# Altium PCB jetsonStuff (4).PCBDOC
Units mil, origin at the board's own origin, x right, y up, seen from the top; angles counter-clockwise.
Board outline 2609.56 x 1008.54 mil, 4 copper layers (Top Layer, Top, Mid-Layer 1, Mid-Layer 2, Bottom Layer, Bottom); 25 components, 15 nets, 79 pads, 27 vias.
Unrouted connection lines stored in the file: 1.
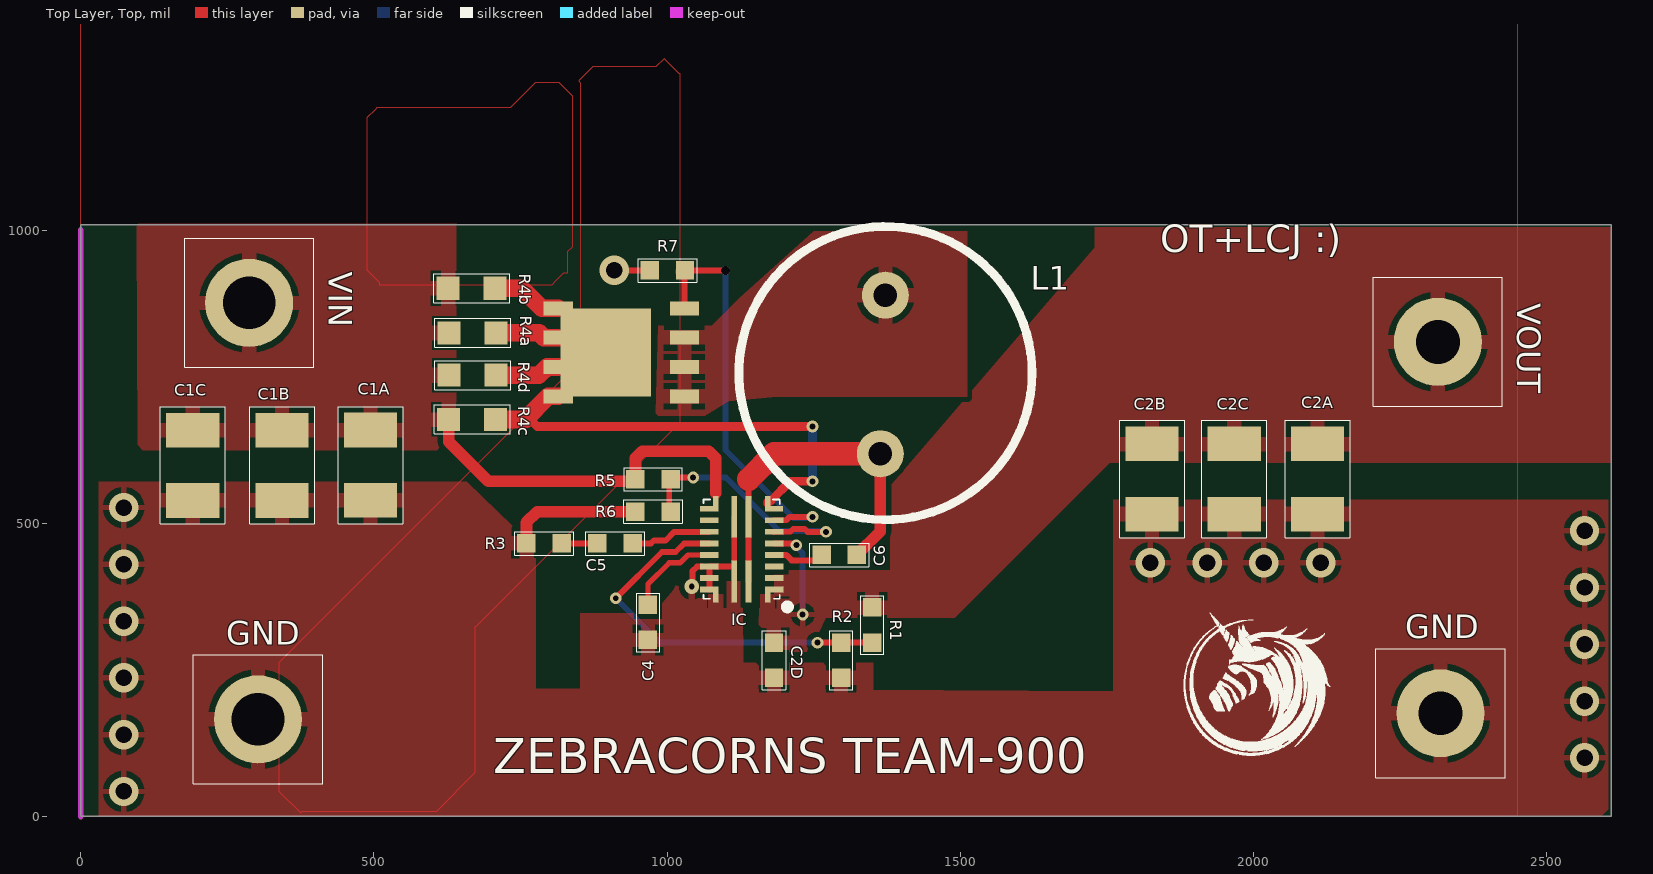
[diagram p0: Top Layer, Top view]
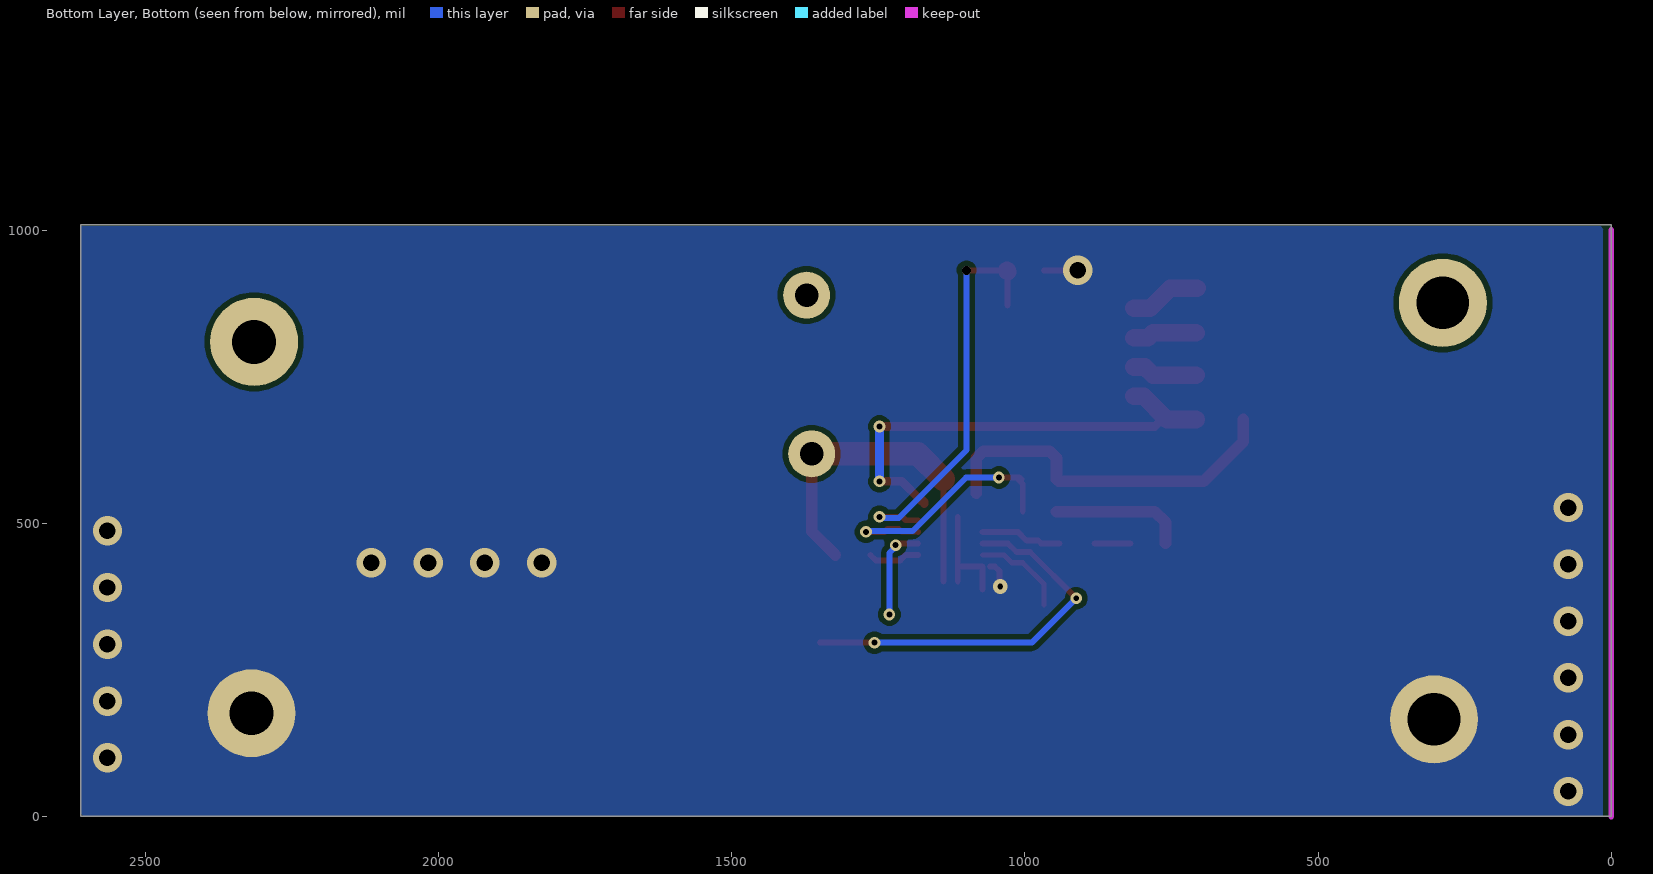
[diagram p1: Bottom Layer, Bottom view, seen from below]

## Layer stack, top to bottom
Top Solder, Top Mask: solder mask 0.4, Solder Resist, Dk 3.5
Top Layer, Top: signal copper 1.4
Dielectric1: core 12.6, FR-4, Dk 4.8
Mid-Layer 1: signal copper 1.4
Dielectric2: prepreg 12.6, FR-4, Dk 4.8
Mid-Layer 2: signal copper 1.4
Dielectric3: core 12.6, FR-4, Dk 4.8
Bottom Layer, Bottom: signal copper 1.4
Bottom Solder, Bot Mask: solder mask 0.4, Solder Resist, Dk 3.5

## Board outline
0,1 0,1009.54 2609.56,1009.54 2609.56,1

## Design rules (kind name [scope] priority, off if disabled: settings)
Clearance Clearance_1 [InNamedPolygon('NETC1A_1_L04_P066')] p1: gap=10 ignorepadtopadclearanceinfootprint=FALSE except(0: Arc-Hole Track-Hole SMDPad-Hole THPad-Hole Via-Hole Fill-Hole Poly-Hole Region-Hole Text-Hole)
Clearance Clearance_GND1_PLANE [(InNet('GND1') AND IsRegion) vs (OnLayer('Bottom Layer, Bottom') OR OnLayer('Multi-Layer'))] p2: gap=25 ignorepadtopadclearanceinfootprint=FALSE except(0: Arc-Hole Track-Hole SMDPad-Hole THPad-Hole Via-Hole Fill-Hole Poly-Hole Region-Hole Text-Hole)
Clearance Clearance_U1 [InComponent('U1') vs InComponent('U1')] p3: gap=9 ignorepadtopadclearanceinfootprint=FALSE except(0: Arc-Hole Track-Hole SMDPad-Hole THPad-Hole Via-Hole Fill-Hole Poly-Hole Region-Hole Text-Hole)
Clearance [All] p4: gap=9 ignorepadtopadclearanceinfootprint=FALSE except(0: Arc-Hole Track-Hole SMDPad-Hole THPad-Hole Via-Hole Fill-Hole Poly-Hole Region-Hole Text-Hole)
FabricationTestpoint [(IsPad And (OnTopLayer Or OnBottomLayer))] p1: side=3 testpointundercomponent=TRUE minsize=40 maxsize=100 preferedsize=60 minholesize=0 maxholesize=40 preferedholesize=32 testpointgrid=1 allowsidetop=TRUE allowsidebottom=TRUE usegrid=TRUE gridtolerance=0.01
HoleSize [All] p1: absolutevalues=TRUE maxlimit=120 minlimit=9 maxpercent=80.000 minpercent=20.000
MinimumSolderMaskSliver [All] p1: minsoldermaskwidth=0
PlaneClearance [All] p1: clearance=9
PlaneConnect [All] p1: planeconnectstyle=Direct reliefexpansion=20 reliefentries=4 reliefconductorwidth=10 reliefairgap=10
PolygonConnect PolygonConnect_11 [All vs IsNamedPolygon('NETC1A_1_L04_P068')] p1: thpad.connectstyle=Relief thpad.reliefconductorwidth=25 thpad.reliefentries=4 thpad.polygonreliefangle="90 Angle" thpad.airgapwidth=10 smdpad.connectstyle=Relief smdpad.reliefconductorwidth=25 smdpad.reliefentries=4 smdpad.polygonreliefangle="90 Angle" smdpad.airgapwidth=10 via.connectstyle=Relief via.reliefconductorwidth=10 via.reliefentries=4 via.polygonreliefangle="90 Angle" via.airgapwidth=10
PolygonConnect PolygonConnect_10 [All vs IsNamedPolygon('GND_L01_P064')] p2: thpad.connectstyle=Relief thpad.reliefconductorwidth=25 thpad.reliefentries=4 thpad.polygonreliefangle="90 Angle" thpad.airgapwidth=10 smdpad.connectstyle=Relief smdpad.reliefconductorwidth=25 smdpad.reliefentries=4 smdpad.polygonreliefangle="90 Angle" smdpad.airgapwidth=10 via.connectstyle=Relief via.reliefconductorwidth=10 via.reliefentries=4 via.polygonreliefangle="90 Angle" via.airgapwidth=10
PolygonConnect PolygonConnect_9 [All vs IsNamedPolygon('NETC2A_1_L01_P063')] p3: thpad.connectstyle=Relief thpad.reliefconductorwidth=25 thpad.reliefentries=4 thpad.polygonreliefangle="90 Angle" thpad.airgapwidth=10 smdpad.connectstyle=Relief smdpad.reliefconductorwidth=25 smdpad.reliefentries=4 smdpad.polygonreliefangle="90 Angle" smdpad.airgapwidth=10 via.connectstyle=Relief via.reliefconductorwidth=10 via.reliefentries=4 via.polygonreliefangle="90 Angle" via.airgapwidth=10
PolygonConnect PolygonConnect_8 [All vs IsNamedPolygon('NETL1_1_L01_P062')] p4: thpad.connectstyle=Relief thpad.reliefconductorwidth=25 thpad.reliefentries=4 thpad.polygonreliefangle="90 Angle" thpad.airgapwidth=10 smdpad.connectstyle=Relief smdpad.reliefconductorwidth=25 smdpad.reliefentries=4 smdpad.polygonreliefangle="90 Angle" smdpad.airgapwidth=10 via.connectstyle=Relief via.reliefconductorwidth=10 via.reliefentries=4 via.polygonreliefangle="90 Angle" via.airgapwidth=10
PolygonConnect PolygonConnect_7 [All vs IsNamedPolygon('gnd')] p5: thpad.connectstyle=Relief thpad.reliefconductorwidth=25 thpad.reliefentries=4 thpad.polygonreliefangle="90 Angle" thpad.airgapwidth=10 smdpad.connectstyle=Relief smdpad.reliefconductorwidth=25 smdpad.reliefentries=4 smdpad.polygonreliefangle="90 Angle" smdpad.airgapwidth=10 via.connectstyle=Relief via.reliefconductorwidth=10 via.reliefentries=4 via.polygonreliefangle="90 Angle" via.airgapwidth=10
PolygonConnect PolygonConnect_6 [All vs IsNamedPolygon('NETC2A_1_L01_P059')] p6: thpad.connectstyle=Relief thpad.reliefconductorwidth=25 thpad.reliefentries=4 thpad.polygonreliefangle="90 Angle" thpad.airgapwidth=10 smdpad.connectstyle=Relief smdpad.reliefconductorwidth=25 smdpad.reliefentries=4 smdpad.polygonreliefangle="90 Angle" smdpad.airgapwidth=10 via.connectstyle=Relief via.reliefconductorwidth=10 via.reliefentries=4 via.polygonreliefangle="90 Angle" via.airgapwidth=10
PolygonConnect PolygonConnect_5 [All vs IsNamedPolygon('NETC1A_1_L01_P057')] p7: thpad.connectstyle=Relief thpad.reliefconductorwidth=25 thpad.reliefentries=4 thpad.polygonreliefangle="90 Angle" thpad.airgapwidth=10 smdpad.connectstyle=Relief smdpad.reliefconductorwidth=25 smdpad.reliefentries=4 smdpad.polygonreliefangle="90 Angle" smdpad.airgapwidth=10 via.connectstyle=Relief via.reliefconductorwidth=10 via.reliefentries=4 via.polygonreliefangle="90 Angle" via.airgapwidth=10
PolygonConnect PolygonConnect_4 [All vs IsNamedPolygon('NETC1A_1_L01_P057')] p8: thpad.connectstyle=Relief thpad.reliefconductorwidth=25 thpad.reliefentries=4 thpad.polygonreliefangle="90 Angle" thpad.airgapwidth=10 smdpad.connectstyle=Relief smdpad.reliefconductorwidth=25 smdpad.reliefentries=4 smdpad.polygonreliefangle="90 Angle" smdpad.airgapwidth=10 via.connectstyle=Relief via.reliefconductorwidth=10 via.reliefentries=4 via.polygonreliefangle="90 Angle" via.airgapwidth=10
PolygonConnect PolygonConnect_3 [All vs IsNamedPolygon('NETC1A_1_L01_P057')] p9: thpad.connectstyle=Relief thpad.reliefconductorwidth=25 thpad.reliefentries=4 thpad.polygonreliefangle="90 Angle" thpad.airgapwidth=10 smdpad.connectstyle=Relief smdpad.reliefconductorwidth=25 smdpad.reliefentries=4 smdpad.polygonreliefangle="90 Angle" smdpad.airgapwidth=10 via.connectstyle=Relief via.reliefconductorwidth=10 via.reliefentries=4 via.polygonreliefangle="90 Angle" via.airgapwidth=10
PolygonConnect PolygonConnect_2 [All vs IsNamedPolygon('NETC1A_1_L01_P057')] p10: thpad.connectstyle=Relief thpad.reliefconductorwidth=25 thpad.reliefentries=4 thpad.polygonreliefangle="90 Angle" thpad.airgapwidth=10 smdpad.connectstyle=Relief smdpad.reliefconductorwidth=25 smdpad.reliefentries=4 smdpad.polygonreliefangle="90 Angle" smdpad.airgapwidth=10 via.connectstyle=Relief via.reliefconductorwidth=10 via.reliefentries=4 via.polygonreliefangle="90 Angle" via.airgapwidth=10
PolygonConnect PolygonConnect_1 [All vs IsNamedPolygon('Top Layer, Top-No Net')] p11: thpad.connectstyle=Relief thpad.reliefconductorwidth=10 thpad.reliefentries=4 thpad.polygonreliefangle="90 Angle" thpad.airgapwidth=10 smdpad.connectstyle=Relief smdpad.reliefconductorwidth=20 smdpad.reliefentries=4 smdpad.polygonreliefangle="90 Angle" smdpad.airgapwidth=10 via.connectstyle=Relief via.reliefconductorwidth=10 via.reliefentries=4 via.polygonreliefangle="90 Angle" via.airgapwidth=10
PolygonConnect [All] p12: connectstyle=Direct reliefconductorwidth=10 reliefentries=4 polygonreliefangle="90 Angle" airgapwidth=10
RoutingVias [All] p1: holewidth=28 width=120 viastyle="Through Hole" minholewidth=9 minwidth=16 maxholewidth=100 maxwidth=50
SilkToSilkClearance [All] p1: silktosilkclearance=0
SilkToSolderMaskClearance SilkscreenOverComponentPads [IsPad] p1: minsilkscreentomaskgap=0 clearancetoexposedcopper=TRUE
SolderMaskExpansion [All] p1: expansion=4 istentingtop=FALSE
Width [All] p1: maxlimit=40 minlimit=7 preferedwidth=30
23 further rules are at their usual default settings.

## Classes and differential pairs
component class T-EV3435: C1A C1C C2B C2C C2D C5 C6 GND R2 R4a R4b R4c R4d R5 R6 R7 VOUT

## Components (designator, comment, footprint, x,y, rotation, side; value= is the part's Value field where it differs from the comment)
C1A "CAP/1210" CAP/1210 494,659.76 r270 top
C1B "CAP/1210" CAP/1210 343.39,659.67 r270 top
C1C "CAP/1210" CAP/1210 191.07,659.67 r270 top
C2A "CAP/1210" CAP/1210 2109.12,636.25 r270 top
C2B "CAP/1210" CAP/1210 1826.93,636.26 r270 top
C2C "CAP/1210" CAP/1210 1967,636.25 r270 top
C2D "CAP/0603" CAP/0603 1182.24,297.25 r270 top
C4 "CAP/0603" CAP/0603 967.23,301.85 r90 top (schematic designator C5)
C5 "CAP/0603" CAP/0603 881.17,466.51 r0 top
C6 "CAP/0603" CAP/0603 1263.5,446.82 r0 top
GND "GND" TP2MM#1 2318.93,176.85 r0 top (schematic designator VIN)
GND "GND" TP2MM#2 302.26,166.58 r0 top (schematic designator VIN)
IC "MP3435" QFN(3x4mm) 1182.28,387.76 r180 top (schematic designator U1)
R1 "RES/0603" RES/0603 1349.53,297.25 r90 top
R2 "RES/0603" RES/0603 1296.61,237.25 r90 top
R3 "RES/0603" RES/0603 760,466.51 r0 top (schematic designator R1)
R4a "RES/0805" CAP/0805 628.08,825.35 r0 top
R4b "RES/0805" CAP/0805 626.53,901.54 r0 top
R4c "RES/0805" CAP/0805 627.44,677.74 r0 top
R4d "RES/0805" CAP/0805 628.09,753.32 r0 top
R5 "RES/0603" RES/0603 1005.97,575.83 r180 top
R6 "RES/0603" RES/0603 945.97,520.64 r0 top
R7 "RES/0603" RES/0603 970.44,932 r0 top
VIN "VIN" TP2MM#2 287.4,876.69 r0 top
VOUT "VOUT" TP2MM#1 2314.12,810.18 r0 top (schematic designator VIN)

## Footprints (in the part's own frame and the unit in brackets; to place one, negate y for a bottom-side part, rotate by r counter-clockwise, add the part's x,y. Pads: shape width x height; smd on the part's side, far side on the other; paste and mask are expansions set on the pad)
CAP/0603 [mm]
  rect 0.8x0.8 smd: 1(0,0) 2(1.524,0)
  silkscreen extent -0.51,-0.51 2.03,0.51
CAP/0805 [mm]
  rect 1x1 smd: 1(0,0) 2(2.032,0)
  silkscreen extent -0.62,-0.62 2.67,0.64
CAP/1210 [mm]
  rect 1.5x2.3 smd paste-25.4: 1(0,0) 2(3.048,0)
  silkscreen extent -1.02,-1.4 4.06,1.4
QFN(3x4mm) [mm]
  rect 0.8x0.25 smd: 1(0,0) 2(0,-0.5) 3(0,-1) 4(0,-1.5) 5(0,-2) 6(0,-2.5) 7(0,-3) 8(0.001,-3.5) 11(2.8,-3.5) 12(2.8,-3) 13(2.8,-2.5) 14(2.8,-2) 15(2.8,-1.5) 16(2.8,-1) 17(2.8,-0.5) 18(2.8,0)
  rect 0.25x0.675 smd: 1(0.275,0.213) 8(0.276,-3.713) 11(2.525,-3.713) 18(2.525,0.213)
  rect 0.25x1.8 smd: 9(1.1,-3.15) 10(1.725,-3.15) 19(1.725,-0.35) 20(1.1,-0.35)
  silkscreen extent -0.66,-3.9 3.05,0.83
RES/0603 [mm]
  rect 0.8x0.8 smd: 1(0,0) 2(1.524,0)
  silkscreen extent -0.51,-0.51 2.03,0.51
TP2MM#1 [mil]
  round 150 hole 75: 1(0,0)
  silkscreen extent -110,-110 110,110
TP2MM#2 [mil]
  round 150 hole 90: 1(0,0)
  silkscreen extent -110,-110 110,110

## Part data
C2D: library part CAP/1210
GND GND VIN VOUT: library part TP/2MM, "2mm  plugin pin"
R1 R2 R3 R4a R4b R4c R4d R5 R6 R7: "Film Res., 1%"

## Free pads (board coordinates)
  rect 50x24 smd paste+0: 1(1029.49,717.33) 2(1029.49,767.33) 3(1029.49,817.33) 4(1029.49,867.33) 5(814.49,867.33) 6(814.49,817.33) 7(814.49,767.33) 8(814.49,717.33)
  rect 154x150 smd paste+0: 9(895.49,792.33)
  round 80 hole 40: 22(1372.21,889.74) 23(1363.5,619.1)

## Via types
v1: diameter 50, hole 28, Top Layer, Top to Bottom Layer, Bottom, 16 vias
v2: diameter 20, hole 10, Top Layer, Top to Bottom Layer, Bottom, 9 vias
v3: diameter 25, hole 10, Top Layer, Top to Bottom Layer, Bottom, 1 vias
v4: diameter 15, hole 15, Top Layer, Top to Bottom Layer, Bottom, 1 vias

## Nets (pads, with @x,y where several pads share a name; then routed paths per layer and width w, separated by ;. In a path a pad name is that pad's centre, name@x,y a point inside that pad or via, vN(x,y) a via of type N, cw(c..) or ccw(c..) an arc to the next point about the centre after c; other vN are vias at no path point)
GND: C1A.2 C1B.2 C1C.2 C2A.2 C2B.2 C2C.2 C2D.2 C4.1 GND.1 IC.10 IC.16 IC.17 IC.18 IC.19 R2.1 R3.1 R6.1 R7.1 | length 525.4
  Top Layer, Top w10: v1@910.42,931.61 R7.1@967.45,931.61 ; v3@1042.94,393.84 1042.94,418.89 1051.19,427.14 IC.16@1059.64,427.14 ; IC.18@1072.04,387.76 IC.17 IC.16 1114.28,427.14 IC.19@1114.36,427.06 ; IC.19 IC.19@1114.36,427.06 ; IC.10 IC.19@1114.36,427.06
  Top Layer, Top w20: R3.1 760,502.24 778.4,520.64 R6.1 ; v3(1041.99,392.89) v3@1042.94,393.84
  Top Layer, Top w30: v1(910.03,932) v1@910.42,931.61
  other v1: 73.17,43.5 2564.4,100.76 73.17,140.32 2564.4,197.58 73.17,237.14 2564.4,294.4 73.17,333.96 2564.4,391.22 73.17,430.78 1823.91,433.34 1920.73,433.34 2017.55,433.34 2114.37,433.34 2564.4,488.04 73.17,527.6
NetC1A_1: C1A.1 C1B.1 C1C.1 IC.11 R4a.1 R4b.1 R4c.1 R4d.1 R5.2 VIN.1 | length 628.4
  Top Layer, Top w20: R4c.1 627.72,677.45 627.72,639.77 695.21,572.29 942.42,572.29 R5.2 945.97,612.04 957.68,623.76 1071.15,623.76 1082.87,612.04 1082.87,552.17
NetC2A_1: C2A.1 C2B.1 C2C.1 C2D.1 IC.1 IC.2 IC.5 R1.2 VOUT.1 | length 162.3
  Top Layer, Top w10: IC.5 1214.6,466.51 1217.59,463.51 v2(1220.3,463.51)
  Bottom Layer, Bottom w10: v2(1220.3,463.51) 1220.3,460.96 1231.03,450.22 v2@1231.03,344.92
  other v2: 1231.03,345.17
NetC3_1: IC.12
NetC4_1: C4.2 IC.15 | length 160.6
  Top Layer, Top w9: C4.2 967.23,396.95 1003.62,433.34 1022.09,433.34 1035.57,446.82 IC.15
NetC5_1: C5.1 R3.2 | length 61.2
  Top Layer, Top w10: R3.2 C5.1
NetC5_2: C5.2 IC.13 | length 139
  Top Layer, Top w10: C5.2 972.49,466.51 977.41,471.43 997.41,471.43 1012.09,486.11 1071.96,486.11 IC.13
NetC6_1: C6.1 IC.4 | length 88.9
  Top Layer, Top w10: IC.4 1182.35,446.74 1203,446.74 1203.68,446.06 1203.82,446.06 1212.3,437.58 1254.26,437.58 C6.1
NetC6_2: C6.2 IC.9 IC.20 pad.23 | length 605.6
  Top Layer, Top w10: IC.20 1138.97,575.83
  Top Layer, Top w20: C6.2 1363.5,486.82 pad.23
  Top Layer, Top w40: 1138.97,575.83 1182.24,619.1 pad.23
NetEN_1: IC.6 R5.1 R6.2 | length 459.9
  Top Layer, Top w10: R6.2@1003.62,520.64 1003.62,567.73 R5.1@1014.7,578.8 ; R5.1 1008.94,578.8 R5.1@1014.7,578.8 ; v2(1044.33,578.8) R5.1@1014.7,578.8 ; IC.6 1182.35,486.27 1210.28,486.27 1215.13,491.11 1234.48,491.11 1239.4,486.19 v2(1270.86,486.19)
  Bottom Layer, Bottom w10: v2(1044.33,578.8) 1100.12,578.8 1191.41,487.51 1269.54,487.51 v2(1270.86,486.19)
NetL1_1: pad.1 pad.2 pad.3 pad.22
NetQ1_4: IC.7 pad.4 R7.2 | length 701
  Top Layer, Top w10: pad.4@1029.49,871.86 R7.2@1029.49,929.58 ; R7.2 v4(1099.43,932) ; IC.7 1182.35,505.95 1203.1,505.95 1208.93,511.78 v2(1247.75,511.78)
  Top Layer, Top w30: R7.2@1029.49,929.58 1030.44,930.54 R7.2
  Bottom Layer, Bottom w10: v4(1099.43,932) 1099.43,625.52 1215.08,509.87 1245.84,509.87 v2(1247.75,511.78)
NetQ1_5: IC.8 pad.5 pad.6 pad.7 pad.8 pad.9 R4a.2 R4b.2 R4c.2 R4d.2 | length 1149.8
  Top Layer, Top w15: 766.46,677.74 778.42,665.79 v2(1247.75,665.79) ; IC.8@1171.41,533.93 1171.41,537.14 1173.99,539.71 1177.2,539.71 1209.77,572.29 v2(1247.75,572.29)
  Top Layer, Top w20: 758,677.74 766.46,677.74
  Top Layer, Top w30: R4b.2 751.78,901.54 785.99,867.33 pad.5 ; R4c.2 758,677.74 797.59,717.33 pad.8 ; R4d.2 781.27,753.32 795.28,767.33 pad.7 ; R4a.2 781.46,825.35 789.49,817.33 pad.6
  Bottom Layer, Bottom w15: v2(1247.75,572.29) v2(1247.75,665.79)
NetR1_1: IC.14 R1.1 R2.2 | length 666.7
  Top Layer, Top w10: v2(912.49,373) 991.33,451.84 1014.43,451.84 1029.01,466.43 1071.96,466.43 IC.14 ; v2(1256.24,297.25) R2.2 R1.1
  Bottom Layer, Bottom w10: v2(912.49,373) 988.23,297.25 v2(1256.24,297.25)
NetR5_2: 
pads on no net: IC.3

## Polygon pours and split planes (outlines as drawn)
GND on Top Layer, Top "GND_L01_P064" (solid, pour order 64): 852,346.95 977.3,346.95 1010.92,387.76 1028.5,421.93 1035.57,438.82 1128.07,438.82 1129.81,263.05 1351.48,263.05 1351.48,188.99 1343.93,181.43 852,181.43
GND on Top Layer, Top "gnd" (solid, pour order 61): 30.77,571.85 658.64,571.85 775.75,457.43 775.75,219.61 1760.57,214.77 1760.57,541.16 2605.18,541.16 2605.18,12.96 2593.22,1 30.77,1
NetC1A_1 on Top Layer, Top "NETC1A_1_L01_P057" (solid, pour order 57): 95.46,1011.22 640.5,1011.22 640.5,625.55 106.22,625.55 97.25,634.52
NetC2A_1 on Top Layer, Top "NETC2A_1_L01_P063" (solid, pour order 63): 1158.1,420.96 1380.61,420.96 1380.61,564.41 1762.34,1009.54 1754.09,603.53 1490.2,339.64 1270.48,339.64 1242,281.5 1155.2,281.5
NetL1_1 on Top Layer, Top "NETL1_1_L01_P062" (solid, pour order 62): 980.84,684.5 1064.07,684.53 1104.86,709.19 1187.67,716.36 1511.39,716.36 1511.39,998.47 1511.3,998.56 1249.93,998.56 1122.97,884.92 1075.9,837.85 984.99,837.85
NetC2A_1 on Top Layer, Top "NETC2A_1_L01_P059" (solid, pour order 59): 1729.42,1005.38 2609.99,1005.38 2609.99,604.33 1729.42,604.33
NetC1A_1 on Top Layer, Top "Top Layer, Top-No Net" (solid, remove dead copper, shelved, pour order 41): 608,11 673,76 673,104 673,324 676,327 1022,673 1022,1267 1021,1267 995,1293 981,1279 876,1279 873,1279 849,1255 852,1252 852,797 852,777 665,590 338,263 338,44 375,7 378,10 607,10
GND on Top Layer, Top "Top Layer, Top-No Net1" (solid, remove dead copper, shelved, pour order 48): 0,1 0,2451 2450,2451 2450,1
NetQ1_5 on Top Layer, Top "Top Layer, Top-No Net" (solid, remove dead copper, shelved, pour order 55): 837,971 830,964 830,927 823,927 810,914 803,907 510,907 510,911 489,932 489,1192 489,1193 503,1207 506,1210 727,1210 733,1210 760,1237 776,1253 815,1253 833,1235 838,1230 838,972
GND on Bottom Layer, Bottom "GND_L04_P060" (solid, remove dead copper, pour order 60): 5.57,1000.98 11.54,1006.95 2609.26,1006.95 2609.26,5.68 2605.28,1.7 1.59,1.7

## Keep-outs
Keep-Out Layer, Board:
  lines w10: 0,1 0,1001

## Silkscreen, mask and mechanical layers (free items; w line width, h text height)
Top Overlay, Top Silk:
  drawing of 22 lines, arcs and shapes, not listed
  text "OT+LCJ :)" at 1840.63,947.18 h80
  text "L1" at 1619.78,899.03 h40
  text "ZEBRACORNS TEAM-900" at 703.26,74.77 h60
Top Paste, Top Paste:
  region: 1003.99,861.33 1005.89,856.74 1010.49,854.83 1048.49,854.83 1053.08,856.74 1054.98,861.33 1054.98,873.33 1053.08,877.92 1048.49,879.82 1010.49,879.82 1005.89,877.92 1003.99,873.33
  region: 1003.99,811.33 1005.89,806.74 1010.49,804.83 1048.49,804.83 1053.08,806.74 1054.98,811.33 1054.98,823.33 1053.08,827.92 1048.49,829.82 1010.49,829.82 1005.89,827.92 1003.99,823.33
  region: 1003.99,761.33 1005.89,756.74 1010.49,754.83 1048.49,754.83 1053.08,756.74 1054.98,761.33 1054.98,773.33 1053.08,777.92 1048.49,779.82 1010.49,779.82 1005.89,777.92 1003.99,773.33
  region: 1003.99,711.33 1005.89,706.74 1010.49,704.83 1048.49,704.83 1053.08,706.74 1054.98,711.33 1054.98,723.33 1053.08,727.92 1048.49,729.82 1010.49,729.82 1005.89,727.92 1003.99,723.33
  region: 818.16,754.83 819.45,745.04 823.23,735.92 829.24,728.08 837.07,722.07 846.2,718.29 855.99,717.01 934.99,717.01 944.78,718.29 953.9,722.07 961.73,728.08 967.74,735.92 971.52,745.04 972.81,754.83 972.81,829.83 971.52,839.62 967.74,848.74 961.73,856.57 953.9,862.59 944.78,866.36 934.99,867.65 855.99,867.65 846.2,866.36 837.07,862.59 829.24,856.57 823.23,848.74 819.45,839.62 818.16,829.83
  region: 793.99,711.33 795.89,706.74 800.49,704.83 828.49,704.83 833.08,706.74 834.98,711.33 834.98,723.33 833.08,727.92 828.49,729.82 800.49,729.82 795.89,727.92 793.99,723.33
  region: 793.99,761.33 795.89,756.74 800.49,754.83 828.49,754.83 833.08,756.74 834.98,761.33 834.98,773.33 833.08,777.92 828.49,779.82 800.49,779.82 795.89,777.92 793.99,773.33
  region: 793.99,811.33 795.89,806.74 800.49,804.83 828.49,804.83 833.08,806.74 834.98,811.33 834.98,823.33 833.08,827.92 828.49,829.82 800.49,829.82 795.89,827.92 793.99,823.33
  region: 793.99,861.33 795.89,856.74 800.49,854.83 828.49,854.83 833.08,856.74 834.98,861.33 834.98,873.33 833.08,877.92 828.49,879.82 800.49,879.82 795.89,877.92 793.99,873.33
Mechanical 1, Top Assy:
  text ".Designator" at 1433.99,978.94 h40 r270
  text ".Designator" at 1436.83,964.04 h40 r270
ZEBRABoardOutline:
  lines w10: 0,0 0,1000 ; 0,2501 0,3221
Mechanical 4, Title:
  lines w10: -1450,-1199 -1250,-1199 ; -1450,551 -1250,551 ; -1450,2301 -1250,2301 ; 950,-2999 950,-2799 ; 950,3901 950,4101 ; 3350,-2999 3350,-2799 ; 3350,3901 3350,4101 ; 4950,-2799 4950,-1799 7950,-1799 ; 4950,-2649 7950,-2649 ; 4950,-2499 7950,-2499 ; 4950,-2099 7950,-2099 ; 5450,-2499 5450,-2099 ; 5750,-2999 5750,-2799 ; 5750,3901 5750,4101 ; 6750,-2799 6750,-2499 ; 7450,-2499 7450,-2099 ; 7950,-1199 8150,-1199 ; 7950,2301 8150,2301 ; -1450,-2999 8150,-2999 8150,4101 -1450,4101 -1450,-2999 ; -1250,-2799 7950,-2799 7950,3901 -1250,3901 -1250,-2799
  text "A" at -316.88,3883.5 h112.5
  text "B" at 2099.69,3883.5 h112.5
  text "C" at 4474.69,3883.5 h112.5
  text "D" at 6874.69,3883.5 h112.5
  text "1" at -1422.5,3083.5 h112.5
  text "1" at 7977.5,3083.5 h112.5
  text "2" at -1422.5,1308.5 h112.5
  text "2" at 7977.5,1308.5 h112.5
  text "3" at -1422.5,-441.5 h112.5
  text "Title" at 5000,-1966.5 h62.5
  text "MP3435 Demo Board" at 5520,-1994 h50
  text "4" at -1422.5,-2216.5 h112.5
  text "4" at 7977.5,-2216.5 h112.5
  text "Size" at 5000,-2266.5 h62.5
  text "Number" at 5500,-2266.5 h62.5
  text "Rev" at 7500,-2266.5 h62.5
  text "T-EV3435-L-00A.pcb" at 6150,-2349 h50
  text "00A" at 7635,-2399 h50
  text "A" at 5143.61,-2446.75 h125
  text "Luna Lan" at 7341,-2623 h50
  text "9/18/2019" at 5700,-2629 h50
  text "Date" at 5000,-2641.5 h62.5
  text "Drawn by" at 6800,-2641.5 h62.5
  text "1" at 7227.15,-2782.11 h50
  text "1" at 7712.38,-2785.42 h50
  text "Filename" at 5000,-2791.5 h62.5
  text "Sheet" at 6800,-2791.5 h62.5
  text "of" at 7450,-2791.5 h62.5
  text "A" at -316.88,-3016.5 h112.5
  text "B" at 2074.69,-3016.5 h112.5
  text "C" at 4474.69,-3016.5 h112.5
  text "D" at 6874.69,-3016.5 h112.5